# Altium PCB Buck_Converter_PCB_1.PcbDoc
Units mm, origin at the board's own origin, x right, y up, seen from the top; angles counter-clockwise.
Board outline 150 x 100 mm, 2 copper layers (Top Layer, Bottom Layer); 59 components, 30 nets, 152 pads, 22 vias.
Unrouted connection lines stored in the file: 2.
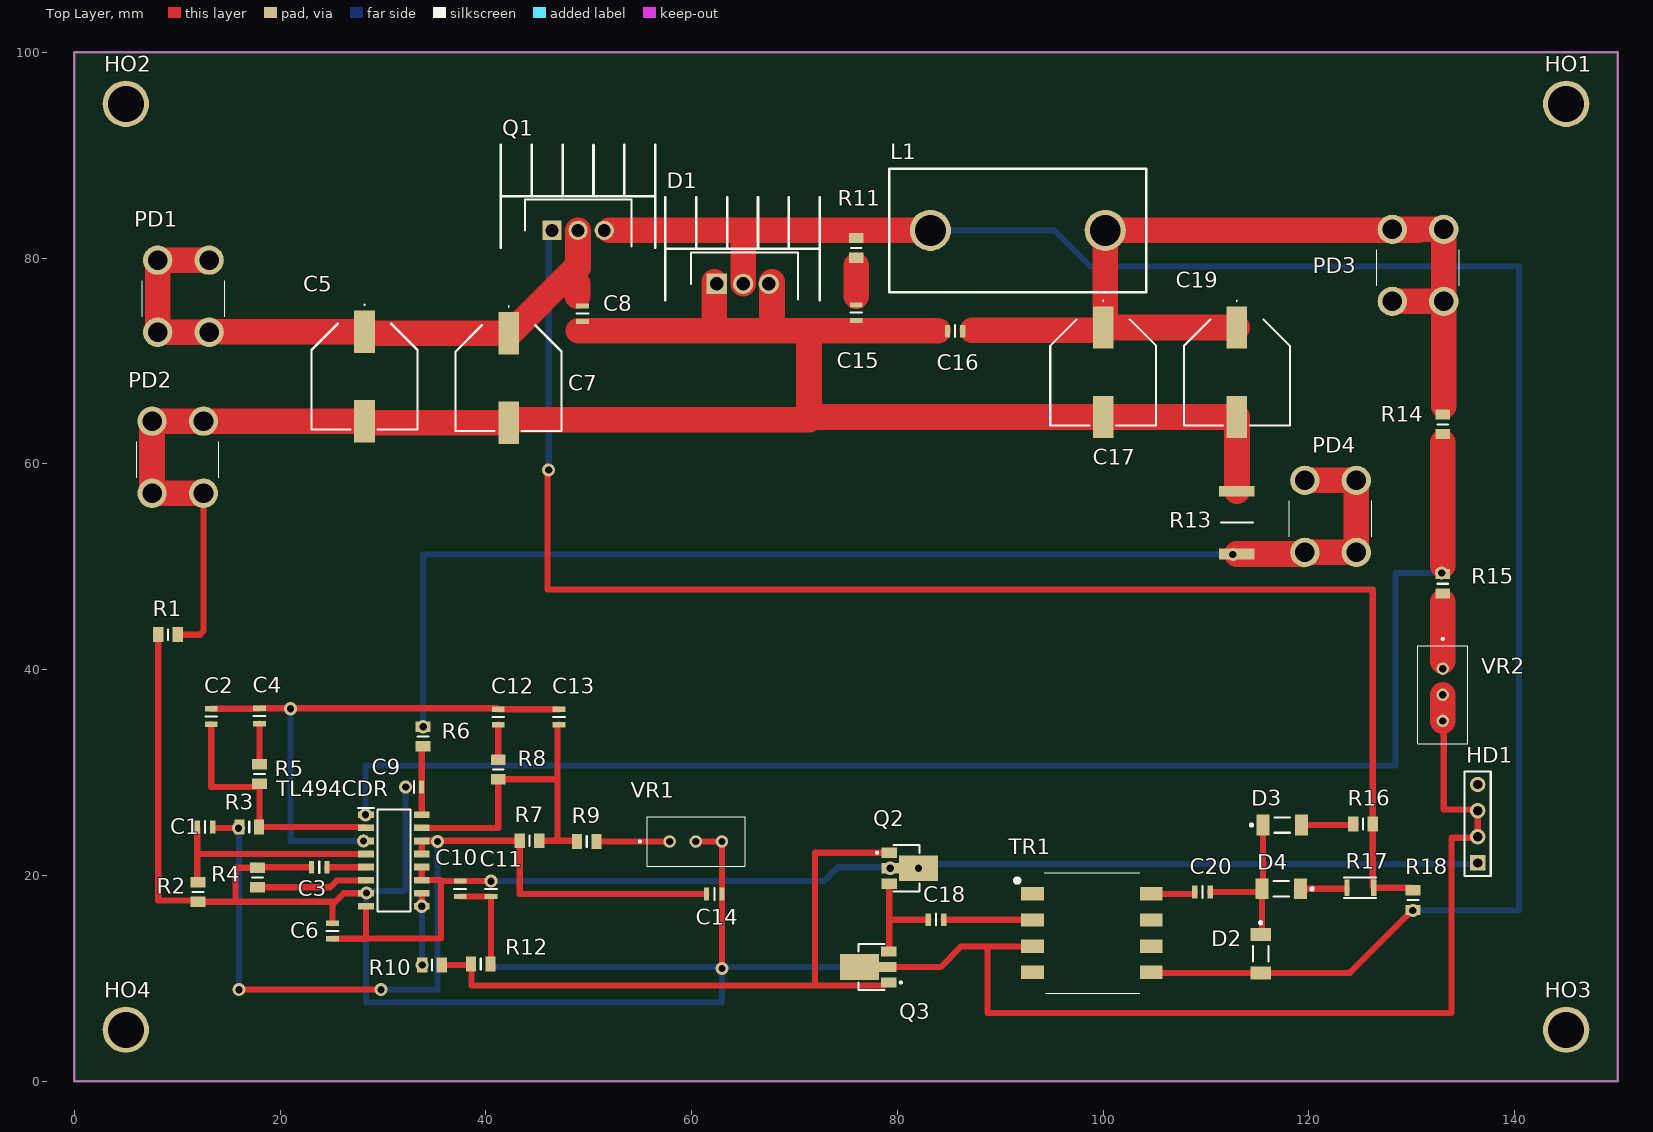
[diagram p0: Top Layer view]
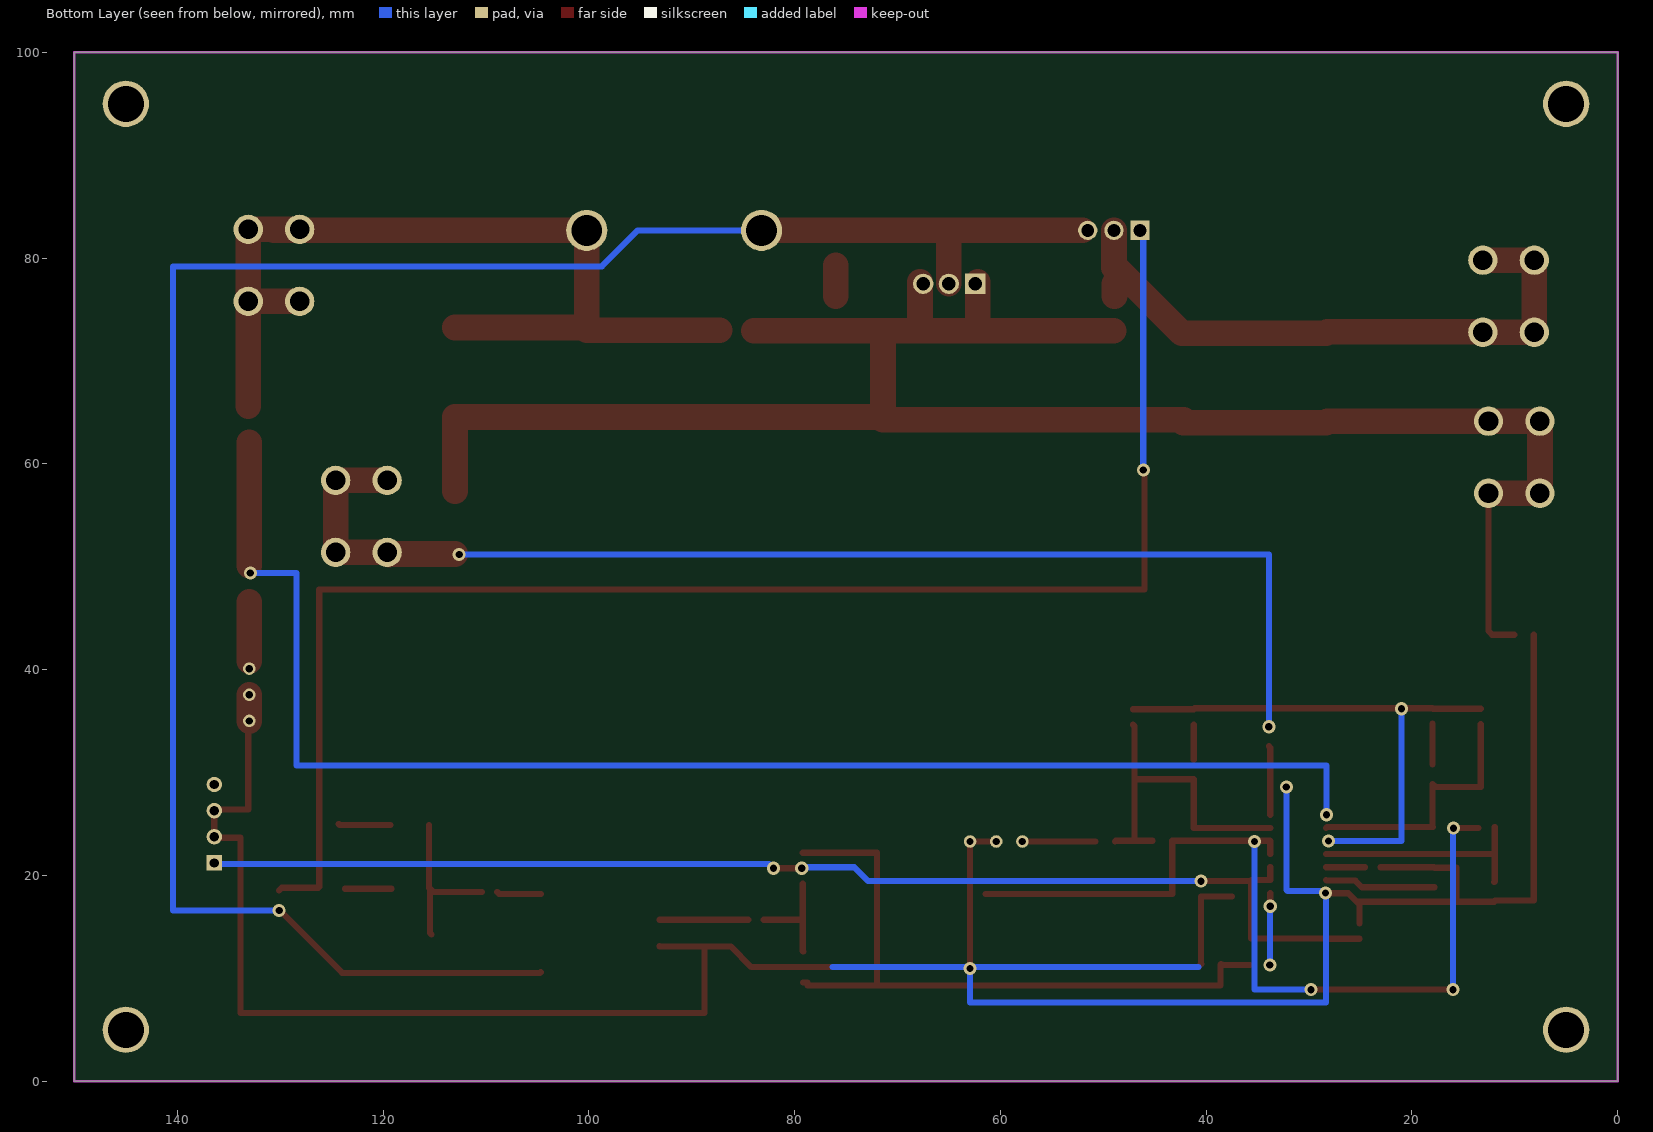
[diagram p1: Bottom Layer view, seen from below]

## Layer stack, top to bottom
Top Solder: solder mask 0.0102, Solder Resist, Dk 3.5
Top Layer: signal copper 0.0356
Dielectric 1: dielectric 0.32, FR-4, Dk 4.8
Bottom Layer: signal copper 0.0356
Bottom Solder: solder mask 0.0102, Solder Resist, Dk 3.5

## Board outline
0,0 150,0 150,100 0,100

## Design rules (kind name [scope] priority, off if disabled: settings)
Clearance [All] p1: gap=0.01
ComponentClearance [All] p1: gap=0.01 collisioncheckmode=3 verticalgap=0.254 showdistances=FALSE
PolygonConnect [All] p1: connectstyle=Relief reliefconductorwidth=0.254 reliefentries=4 polygonreliefangle="90 Angle" airgapwidth=0.254
RoutingVias [All] p1: holewidth=0.711 width=1.27 viastyle="Through Hole" minholewidth=0.711 minwidth=1.27 maxholewidth=0.711 maxwidth=1.27
SolderMaskExpansion [All] p1: expansion=0.102
Width [All] p1: maxlimit=2.5 minlimit=0.254 preferedwidth=0.254
29 further rules are at their usual default settings.

## Components (designator, comment, footprint, x,y, rotation, side; value= is the part's Value field where it differs from the comment)
C1 "1uF" Capacitors_SMD_0805 12.7,24.7 r0 top
C2 "150pF" Capacitors_SMD_0805 13.3,35.45 r90 top
C3 "1nF" Capacitors_SMD_0805 23.8,20.8 r0 top
C4 "100nF" Capacitors_SMD_0805 18,35.5 r90 top
C5 "330uf" Capacitors_SMD_D10 28.2,68.5 r270 top
C6 "1uF" Capacitors_SMD_0805 25.1,14.6 r270 top
C7 "330uf" Capacitors_SMD_D10 42.2,68.35 r270 top
C8 "100nF" Capacitors_SMD_0805 49.4,74.6 r270 top
C9 "1nF" Capacitors_SMD_0805 33,28.6 r0 top
C10 "1uF" Capacitors_SMD_0805 37.5,18.7 r90 top
C11 "100nF" Capacitors_SMD_0805 40.5,18.7 r90 top
C12 "100nF" Capacitors_SMD_0805 41.2,35.4 r90 top
C13 "680pF" Capacitors_SMD_0805 47.1,35.4 r270 top
C14 "100nF" Capacitors_SMD_0805 62.2,18.2 r0 top
C15 "1nF" Capacitors_SMD_0805 76,74.7 r270 top
C16 "100nF" Capacitors_SMD_0805 85.6,72.9 r0 top
C17 "330uF" Capacitors_SMD_D10 100,68.9 r270 top
C18 "100nF" Capacitors_SMD_0805 83.75,15.7 r0 top
C19 "330uF" Capacitors_SMD_D10 113,68.9 r270 top
C20 "100nF" Capacitors_SMD_0805 109.65,18.4 r0 top
D1 "STPS20H100C" TO-220_Diode 65,77.5 r0 top
D2 "1N4148" 1N4148 115.3,12.4 r270 top
D3 "1N4148" 1N4148 117.4,24.9 r0 top
D4 "1N4148" 1N4148 117.3,18.7 r180 top
HD1 "Header 4" HDR1X4 136.4,21.22 r90 top
HO1 "HOLE" Hole 145,95 r0 top
HO2 "HOLE" Hole 5,95 r0 top
HO3 "HOLE" Hole 145,5 r0 top
HO4 "HOLE" Hole 5,5 r0 top
L1 "Inductor" Inductor 91.7,82.7 r0 top
PD1 "Terminal" Terminal 8.1,72.8 r0 top
PD2 "Terminal" Terminal 7.55,57.15 r0 top
PD3 "Terminal" Terminal 128.1,75.8 r0 top
PD4 "Terminal" Terminal 119.6,51.4 r0 top
Q1 "N-MOSFET" TO-220)N-MOSFET 48.96,82.7 r0 top
Q2 "2SCR552P" 2SCR552P 81.2,20.7 r270 top
Q3 "2SAR552P" 2SAR552P 77.15,11.1 r90 top
R1 "0R" RESISTOR_SMD_0805 9.1,43.4 r180 top
R2 "1K" RESISTOR_SMD_0805 12,18.4 r90 top
R3 "3K" RESISTOR_SMD_0805 17,24.7 r0 top
R4 "10K" RESISTOR_SMD_0805 17.8,19.8 r270 top
R5 "20K" RESISTOR_SMD_0805 18,29.85 r270 top
R6 "1K" RESISTOR_SMD_0805 33.9,33.5 r270 top
R7 "24K" RESISTOR_SMD_0805 44.246,23.373 r0 top
R8 "10K" RESISTOR_SMD_0805 41.2,30.3 r90 top
R9 "22R" RESISTOR_SMD_0805 49.8,23.3 r0 top
R10 "22R" RESISTOR_SMD_0805 34.75,11.3 r0 top
R11 "10R" RESISTOR_SMD_0805 76,81 r90 top
R12 "1K" RESISTOR_SMD_0805 39.5,11.4 r180 top
R13 "0R01" RESISTOR_SMD_2512 113,54.3 r270 top
R14 "15K" RESISTOR_SMD_0805 133,63.85 r90 top
R15 "1K5" RESISTOR_SMD_0805 133,48.35 r90 top
R16 "4R7" RESISTOR_SMD_0805 125.25,25 r0 top
R17 "4R7" RESISTOR_SMD_1206 125,18.8 r0 top
R18 "10K" RESISTOR_SMD_0805 130.1,17.6 r90 top
TL494CDR "TL494CDR" TL494CDR 31.05,21.45 r0 top
TR1 "B78307A2276A003" B78307A2276A003 98.9,14.4 r270 top
VR1 "5K" Baoter_3296 57.86,23.3 r180 top
VR2 "5K" Baoter_3296 133,40.1 r90 top

## Footprints (in the part's own frame and the unit in brackets; to place one, negate y for a bottom-side part, rotate by r counter-clockwise, add the part's x,y. Pads: shape width x height; smd on the part's side, far side on the other; paste and mask are expansions set on the pad)
1N4148 [mm]
  rect 1.25x2 smd: A(1.875,0) K(-1.875,0)
  silkscreen extent -3.12,-0.75 0.75,0.75, body extent -1.85,-0.8 1.85,0.8, height 1.6
2SAR552P [mm]
  rect 1x1.5 smd: 1(-1.5,-2) 3(1.5,-2)
  rect 2.5x3.8 smd: 2(0,0.85)
  rect 1x1.7 smd: 2(0,-1.9)
  silkscreen extent -2.25,-3.27 2.25,0.92, body extent -2.27,-2.27 2.27,1.73, height 1.6
2SCR552P [mm]
  rect 1x1.5 smd: 1(-1.5,-2) 3(1.5,-2)
  rect 2.5x3.8 smd: 2(0,0.85)
  rect 1x1.7 smd: 2(0,-1.9)
  silkscreen extent -2.25,-3.27 2.25,0.93, body extent -2.28,-2.27 2.28,1.73, height 1.6
B78307A2276A003 [mm]
  rect 1.3x2.21 smd: 1(-3.81,-5.77) 2(-1.27,-5.77) 3(1.27,-5.77) 4(3.81,-5.77) 5(3.81,5.77) 6(1.27,5.77) 7(-1.27,5.77) 8(-3.81,5.77)
  silkscreen extent -5.85,-7.3 5.85,4.65, body extent -5.94,-6.79 5.76,6.37, height 11.35
Baoter_3296 [mm]
  round 1.217 hole 0.71: 1(0,0) 2(-2.54,0) 3(-5.08,0)
  silkscreen extent -7.3,-2.41 3,2.42
Capacitors_SMD_0805 [mm]
  rect 0.5x1.25 smd: 1(-0.75,0) 2(0.75,0)
  silkscreen extent 0,-0.57 0,0.57
Capacitors_SMD_D10 [mm]
  rect 4.1x2 smd: 1(-4.35,0) 2(4.35,0)
  silkscreen extent -7,-5.15 5.15,5.15
HDR1X4 [mm] "Connector; Header; 4 Position"
  rect 1.5x1.5 hole 0.9: 1(0,0)
  round 1.5 hole 0.9: 2(2.54,0) 3(5.08,0) 4(7.62,0)
  silkscreen extent -1.27,-1.27 8.89,1.27
Hole [mm]
  round 4.5 hole 3.5: 1(0,0)
Inductor [mm]
  round 4 hole 3: 1(-8.5,0) 2(8.5,0)
  silkscreen extent -12.5,-6 12.5,6
RESISTOR_SMD_0805 [mm]
  rect 1x1.45 smd: 1(-0.95,0) 2(0.95,0)
  silkscreen extent 0,-0.53 0,0.53
RESISTOR_SMD_1206 [mm]
  rect 0.5x1.6 smd: 1(-1.3,0) 2(1.3,0)
  silkscreen extent -1.6,-1 1.5,1
RESISTOR_SMD_2512 [mm]
  rect 1.05x3.45 smd: 1(-3.05,0) 2(3.05,0)
  silkscreen extent 0,-1.55 0,1.55
Terminal [mm]
  round 2.85 hole 1.9: 1(0,0) 1(0,7) 1(5,0) 1(5,7)
  silkscreen extent -1.5,1.5 6.5,5
TL494CDR [mm]
  rect 1.525x0.65 smd: 1(-2.712,4.445) 2(-2.712,3.175) 3(-2.712,1.905) 4(-2.712,0.635) 5(-2.712,-0.635) 6(-2.712,-1.905) 7(-2.712,-3.175) 8(-2.712,-4.445) 9(2.712,-4.445) 10(2.712,-3.175) 11(2.712,-1.905) 12(2.712,-0.635) 13(2.712,0.635) 14(2.712,1.905) 15(2.712,3.175) 16(2.712,4.445)
  silkscreen extent -3.47,-4.95 1.6,5.12
TO-220)N-MOSFET [mm]
  rect 1.875x1.875 / inner round 1.875 / far side rect 1.875x1.875 hole 1.25: 1(-2.54,0)
  round 1.875 hole 1.25: 2(0,0) 3(2.54,0)
  silkscreen extent -7.5,-1.7 7.5,8.3
TO-220_Diode [mm]
  rect 1.98x1.98 / inner round 1.98 / far side rect 1.98x1.98 hole 1.32: A1(-2.55,0)
  round 1.98 hole 1.32: A2(2.5,0) K(0,0)
  silkscreen extent -7.55,-1.6 7.45,8.4

## Part data
C1: library part C1, "SMD_0805"
C2: library part C2, "SMD_0805"
C3: library part C3, "SMD_0805"
C4: library part C4, "SMD_0805"
C5: library part C5, "SMD_D10"
C6: library part C6, "SMD_0805"
C7: library part C7, "SMD_D10"
C8: library part C8, "SMD_0805"
C9: library part C9, "SMD_0805"
C10: library part C10, "SMD_0805"
C11: library part C11, "SMD_0805"
C12: library part C12, "SMD_0805"
C13: library part C13, "SMD_0805"
C14: library part C14, "SMD_0805"
C15: library part C15, "SMD_0805"
C16: library part C16, "SMD_0805"
C17: library part C17, "SMD_D10"
C18: library part C18, "SMD_0805"
C19: library part C19, "SMD_D10"
C20: library part C20, "SMD_0805"
D1: library part D1, "Schottky"
D2: library part D2, "Diode"
D3: library part D3, "Diode"
D4: library part D4, "Diode"
HD1: "Header, 4-Pin"
HO1: library part HO1
HO2: library part HO2
HO3: library part HO3
HO4: library part HO4
L1: library part L1
PD1: library part PD1
PD2: library part PD2
PD3: library part PD3
PD4: library part PD4
Q1: library part Q1
Q2: library part Q2, "NPN-BJT"
Q3: library part Q3, "PNP-BJT"
R1: library part R1, "SMD_0805"
R2: library part R2, "SMD_0805"
R3: library part R3, "SMD_0805"
R4: library part R4, "SMD_0805"
R5: library part R5, "SMD_0805"
R6: library part R6, "SMD_0805"
R7: library part R7, "SMD_0805"
R8: library part R8, "SMD_0805"
R9: library part R9, "SMD_0805"
R10: library part R10, "SMD_0805"
R11: library part R11, "SMD_0805"
R12: library part R12, "SMD_0805"
R13: library part R13, "SMD_2512"
R14: library part R14, "SMD_0805"
R15: library part R15, "SMD_0805"
R16: library part R16, "SMD_0805"
R17: library part R17, "SMD_1206"
R18: library part R18, "SMD_0805"
TL494CDR: "PWM_controller"
TR1: library part TR1, "SMDTransformers"
VR1: library part VR1, "Baoter_3296"
VR2: library part VR2, "Baoter_3296"

## Via types
v1: diameter 1.27, hole 0.711, Top Layer to Bottom Layer, 22 vias

## Nets (pads, with @x,y where several pads share a name; then routed paths per layer and width w, separated by ;. In a path a pad name is that pad's centre, name@x,y a point inside that pad or via, vN(x,y) a via of type N, cw(c..) or ccw(c..) an arc to the next point about the centre after c; other vN are vias at no path point)
5V: C1.2 C14.1 R3.1 R7.1 TL494CDR.13 TL494CDR.14 | length 86.1
  Top Layer w0.6: C1.2@13.55,24.6 v1(15.95,24.6) R3.1 ; v1(16,8.9) v1(29.8,8.9) ; TL494CDR.13 TL494CDR.14 33.78,23.373 R7.1 43.296,18.2 C14.1
  Bottom Layer w0.6: v1(15.95,24.6) 16,24.55 v1(16,8.9) ; v1(29.8,8.9) 35.3,8.9 v1(35.3,23.3)
12V: C6.2 C10.2 C11.2 HD1.1 Q2.2 TL494CDR.8 TL494CDR.11 TL494CDR.12 | length 124
  Top Layer w0.6: C6.2 28.35,13.85 28.338,13.862 ; TL494CDR.8 28.338,13.862 ; TL494CDR.12 TL494CDR.11 35.555,19.545 35.638,19.462 ; v1(40.5,19.45) C10.2 37.488,19.462 35.638,19.462 ; v1(79.3,20.7) v1(82.05,20.7) ; 28.338,13.862 35.638,13.862 35.638,19.462
  Bottom Layer w0.6: v1(40.5,19.45) 72.85,19.45 74.2,20.8 79.2,20.8 v1(79.3,20.7) ; v1(82.05,20.7) 82.47,21.12 HD1.1@136.4,21.12
  other v1: 136.4,21.22
AG: C3.1 C6.1 C9.1 C10.1 C11.1 C14.2 HD1.2 HD1.3 Q3.2 R1.2 R2.1 R4.1 R12.1 TL494CDR.7 TR1.3 VR1.2 VR1.3 VR2.2 VR2.3 | length 288.2
  Top Layer w0.6: R1.2 8.15,17.55 11.9,17.55 R2.1 15.65,17.45 ; C3.1 17.85,20.8 R4.1 15.65,20.75 15.65,17.45 ; C6.1 25.1,17.2 25.35,17.45 ; TL494CDR.7 26.175,18.275 25.35,17.45 ; C10.1 C11.1 40.5,11.45 R12.1 R12.1@40.75,11.1 ; VR1.2 VR1.3 62.94,18.21 C14.2 v1(62.95,10.95) ; Q3.2@76.3,11.1 79.05,11.1 84.2,11.1 86.2,13.1 88.6,13.1 ; TR1.3 93.1,13.1 88.6,13.1 ; VR2.3@133.1,34.6 133.1,26.4 HD1.3@136.3,26.4 ; HD1.3@136.2,26.5 HD1.3@136.3,26.4 ; HD1.2@136.4,23.66 133.86,23.66 133.86,6.64 88.76,6.64 88.76,12.94 88.6,13.1 ; HD1.2 HD1.3 HD1.3@136.3,26.4 ; HD1.3@136.6,26.4 HD1.3@136.3,26.4 ; 15.65,17.45 25.35,17.45
  Top Layer w2.5: VR2.3 VR2.2
  Bottom Layer w0.6: v1(32.2,28.6) 32.2,18.6 32.1,18.5 28.6,18.5 v1(28.4,18.3) 28.35,18.25 28.35,7.65 62.95,7.65 v1(62.95,10.95) ; 40.75,11.1 76.3,11.1
CS: PD4.1 R6.1 R13.2 | length 118.9
  Top Layer w2.5: R13.2 119.35,51.25 PD4.1@119.4,51.2 ; PD4.1@119.6,51.4 124.6,51.4 124.6,58.4 PD4.1@119.6,58.4
  Bottom Layer w0.6: v1(33.9,34.45) 33.9,51.2 v1(112.6,51.2)
GATE: Q1.1 R16.2 R17.2 R18.2 | length 148.6
  Top Layer w0.6: v1@46,59.8 46,47.8 126.2,47.8 R16.2 126.2,18.9 R17.2 129.85,18.8 R18.2
  Bottom Layer w0.6: v1(46.1,59.4) 46.1,82.38 v1(46.42,82.7)
NetC1_1: C1.1 R2.2 TL494CDR.4 | length 21.8
  Top Layer w0.6: C1.1 11.95,22.15 ; R2.2 11.95,19.4 11.95,22.15 ; TL494CDR.4 12.015,22.085 11.95,22.15
NetC2_1: C2.1 R3.2 R5.2 TL494CDR.2 | length 25.6
  Top Layer w0.6: C2.1 13.3,28.6 17.7,28.6 R5.2 18,24.75 R3.2 28.263,24.7 TL494CDR.2
NetC2_2: C2.2 C4.2 C12.2 C13.1 TL494CDR.3 | length 54
  Top Layer w0.6: C2.2 17.95,36.2 C4.2 41.1,36.25 C12.2 C13.1
  Bottom Layer w0.6: v1(21,36.2) 21,23.355 v1(28.1,23.355) v1@28.338,23.355
NetC3_2: C3.2 TL494CDR.5 | length 3.8
  Top Layer w0.6: C3.2 28.323,20.8 TL494CDR.5
NetC4_1: C4.1 R5.1 | length 3.9
  Top Layer w0.6: R5.1 C4.1
NetC5_1: C5.1 C7.1 C8.1 PD1.1 Q1.2 | length 60.4
  Top Layer w0.26: C5.1 C5.1@28.35,72.7
  Top Layer w2.5: PD1.1@13.05,72.85 C5.1 ; PD1.1@13.1,72.8 8.1,72.8 8.1,79.8 PD1.1@13.1,79.8 ; C5.1@28.35,72.7 C7.1 42.36,72.7 48.76,79.1 48.96,79.1 Q1.2 ; 48.9,76.3 48.9,77.5
NetC9_2: C9.2 R6.2 TL494CDR.16 | length 6.7
  Top Layer w0.6: TL494CDR.16 33.762,32.412 R6.2
NetC12_1: C12.1 R8.2 | length 3.4
  Top Layer w0.6: R8.2 C12.1
NetC13_2: C13.2 R7.2 R8.1 R9.1 TL494CDR.15 | length 33
  Top Layer w0.6: TL494CDR.15 41.2,24.625 R8.1 46.95,29.35 ; R7.2 47,23.373 ; C13.2 46.95,34.5 46.95,29.35 ; R9.1 48.777,23.373 47,23.373 ; 46.95,29.35 46.95,23.423 47,23.373
NetC15_1: C15.1 R11.1 | length 3
  Top Layer w2.5: 76,76.3 76,79.3
NetC16_2: C16.2 C17.1 C19.1 L1.2 PD3.1 R14.2 | length 93.2
  Top Layer w2.5: 87.3,73 100.2,73 C17.1@100.2,73.25 ; C17.1 C17.1@100.2,73.25 ; C19.1 C17.1@100.2,73.25 ; PD3.1@128.1,75.8 PD3.1@133.1,75.8 ; PD3.1@128.1,82.8 133.1,82.8 PD3.1@133.1,75.8 ; 130.6,82.7 L1.2 C17.1@100.2,73.25 ; 133.1,65.6 PD3.1@133.1,75.8
NetC18_1: C18.1 Q2.3 Q3.3 | length 10.5
  Top Layer w0.6: Q3.3 79.2,12.65 79.2,15.8 ; Q2.3 79.2,15.8 ; C18.1 79.3,15.7 79.2,15.8
NetC18_2: C18.2 TR1.2 | length 8.6
  Top Layer w0.6: C18.2 93.1,15.7 TR1.2
NetC20_1: C20.1 TR1.8 | length 4.3
  Top Layer w0.6: TR1.8 108.71,18.21 C20.1
NetC20_2: C20.2 D2.K D3.K D4.A | length 15.9
  Top Layer w0.6: C20.2 115.125,18.4 D4.A ; D2.K 115.425,14.4 D4.A ; D3.K 115.525,18.8 D4.A
NetD3_A: D3.A R16.1 | length 5.1
  Top Layer w0.6: D3.A 124.2,24.9 R16.1
NetD4_K: D4.K R17.1 | length 4.5
  Top Layer w0.6: D4.K R17.1@123.7,18.7
NetQ2_1: Q2.1 Q3.1 R10.2 R12.2 | length 66
  Top Layer w0.6: R10.2 38.45,11.3 R12.2 38.596,11.354 38.596,9.296 72,9.296 ; Q3.1 78.733,9.6 78.733,9.296 72,9.296 ; Q2.1 72,22.2 72,9.296
NetR4_2: R4.2 TL494CDR.6 | length 10.8
  Top Layer w0.6: R4.2 24.85,18.85 25.5,19.5 28.293,19.5 TL494CDR.6
NetR9_2: R9.2 VR1.1 | length 7.1
  Top Layer w0.6: R9.2 VR1.1
NetR10_1: R10.1 TL494CDR.9 TL494CDR.10 | length 7
  Top Layer w0.6: v1(33.762,17.005) TL494CDR.10
  Bottom Layer w0.6: v1(33.762,17.005) 33.8,16.967 v1(33.8,11.3)
NetR15_1: R15.1 VR2.1 | length 5.7
  Top Layer w2.5: 133,40.85 133,46.6
PG: C5.2 C7.2 C8.2 C15.2 C16.1 C17.2 C19.2 D1.A1 D1.A2 PD2.1 R1.1 R13.1 | length 193.9
  Top Layer w0.6: R1.1 12.2,43.4 12.55,43.75 PD2.1@12.55,57.15
  Top Layer w2.5: PD2.1@12.55,57.15 7.55,57.15 7.55,64.15 12.55,64.15 C5.2 28.35,64 C7.2 ; C7.2@42.2,64.3 71.4,64.3 71.4,64.7 ; 49,72.95 62.2,72.95 ; D1.A1@62.2,77.7 62.2,72.95 ; D1.A2@67.8,77.7 67.8,72.95 ; 83.95,72.95 71.4,72.95 ; R13.1 C19.2 C17.2 71.55,64.55 71.4,64.7 ; 62.2,72.95 67.8,72.95 ; 67.8,72.95 71.4,72.95 ; 71.4,64.7 71.4,72.95
REF: D1.K D2.A L1.1 Q1.3 R11.2 R18.1 TR1.5 | length 196
  Top Layer w0.6: TR1.5 104.735,10.525 D2.A 123.975,10.525 R18.1
  Top Layer w2.5: Q1.3@52,82.7 65.1,82.7 ; D1.K 65,82.6 65.1,82.7 ; L1.1 65.1,82.7
  Bottom Layer w0.6: L1.1 95.245,82.7 98.749,79.196 140.404,79.196 140.404,16.6 v1(130.1,16.6)
VFB: R14.1 R15.2 TL494CDR.1 | length 139.9
  Top Layer w2.5: 133,50.1 133,62.1
  Bottom Layer w0.6: v1(28.3,25.9) 28.3,30.7 128.4,30.7 128.4,49.4 ; 128.6,49.4 v1(132.9,49.4)
pads on no net: HD1.4 HO1.1 HO2.1 HO3.1 HO4.1 TR1.1 TR1.4 TR1.6 TR1.7

## Keep-outs
Keep-Out Layer:
  the board outline again, w0.254